# EAGLE board inner-connector (EAGLE 7.2.0)
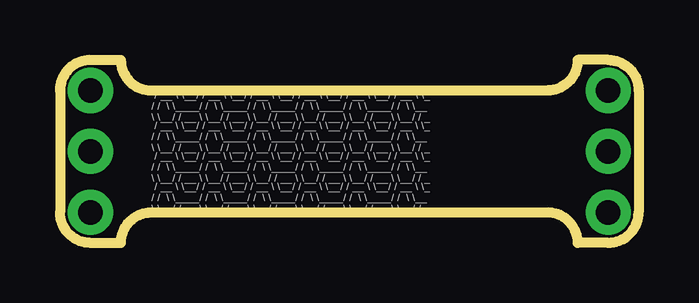
[diagram p0: board, top side]
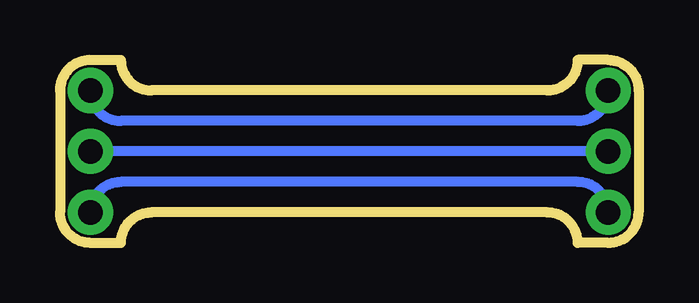
[diagram p1: board, bottom side, seen from below]

Size 24.13 x 7.62 mm. Coordinates in mm from the lower left corner, seen from the top.
Outline: 0,6.35 0,1.27 arc90 1.27,0 2.54,0 arc-90 3.81,1.27 20.32,1.27 arc-90 21.59,0 22.86,0 arc90 24.13,1.27 24.13,6.35 arc90 22.86,7.62 21.59,7.62 arc-90 20.32,6.35 3.81,6.35 arc-90 2.54,7.62 1.27,7.62 arc90 0,6.35
Copper layers (1*16): Top 0.035mm / dielectric 1.5mm / Bottom 0.035mm
Design rules "default": minimum track width 10mil, minimum drill 24mil, track to track 8mil, track to pad 8mil, pad to pad 8mil, via to via 8mil, smd to smd 8mil, copper to edge 40mil, drill to drill 8mil, minimum pad ring 10mil, minimum via ring 8mil, stop-mask expansion 4mil, vias tented up to drill 0mil, thermal gap 10mil

## Footprints (pad centres in the part's own frame; a part is rotated, then mirrored left to right if it is on the bottom)
1X03_NO_SILK = drill 1.016 pad 1.88: 1 0,0; 2 2.54,0; 3 5.08,0

## Placement (x,y rotation side)
JP1  [1X03_NO_SILK]  1.27,1.27 90 top
JP2  [1X03_NO_SILK]  22.86,1.27 90 top

## Library data of the parts
JP1 JP2 = SparkFun-Connectors

## Nets
N$1: JP1.3 JP2.3
N$2: JP1.2 JP2.2
N$3: JP1.1 JP2.1

## Tracks (layer width: path | path; a pad name or v marks a point on that pad's centre or on a via)
N$1
  Bottom 0.406: JP1.3 arc90 2.54,5.08 21.59,5.08 arc90 JP2.3
N$2
  Bottom 0.406: JP1.2 JP2.2
N$3
  Bottom 0.406: JP1.1 arc-90 2.54,2.54 21.59,2.54 arc-90 JP2.1

## Text on the board
tPlace: / __ \ \__/ / __ \ \__/ / __ \ \__/ / __ \ \__/ / __ \ \__/ / __ \ \_ / / / \ \____/ / \ \____/ / \ \____/ / \ \____/ / \ \____/ / \ \__ / \ \__/ / __ \ \__/ / __ \ \__/ / __ \ \__/ / __ \ \__/ / __ \ \__/ / _ | / __ \ \__/ / __ \ \__/ / __ \ \__/ / __ \ \__/ / __ \ \__/ / __ \ \_ / / / \ \____/ / \ \____/ / \ \____/ / \ \____/ / \ \____/ / \ \__ / \ \__/ / __ \ \__/ / __ \ \__/ / __ \ \__/ / __ \ \__/ / __ \ \__/ / _ | / __ \ \__/ / __ \ \__/ / __ \ \__/ / __ \ \__/ / __ \ \__/ / __ \ \_ / / / \ \____/ / \ \____/ / \ \____/ / \ \____/ / \ \____/ / \ \__ / \ \__/ / __ \ \__/ / __ \ \__/ / __ \ \__/ / __ \ \__/ / __ \ \__/ / _ | / __ \ \__/ / __ \ \__/ / __ \ \__/ / __ \ \__/ / __ \ \__/ / __ \ \_ / / / \ \____/ / \ \____/ / \ \____/ / \ \____/ / \ \____/ / \ \__ / \ \__/ / __ \ \__/ / __ \ \__/ / __ \ \__/ / __ \ \__/ / __ \ \__/ / _